# Altium PCB EMS_TC_PCB_V1.PcbDoc
Units mil, origin at the board's own origin, x right, y up, seen from the top; angles counter-clockwise.
Board outline 4800 x 9560 mil, 2 copper layers (Top Layer, Bottom Layer); 57 components, 74 nets, 349 pads, 0 vias.
Unrouted connection lines stored in the file: 159.
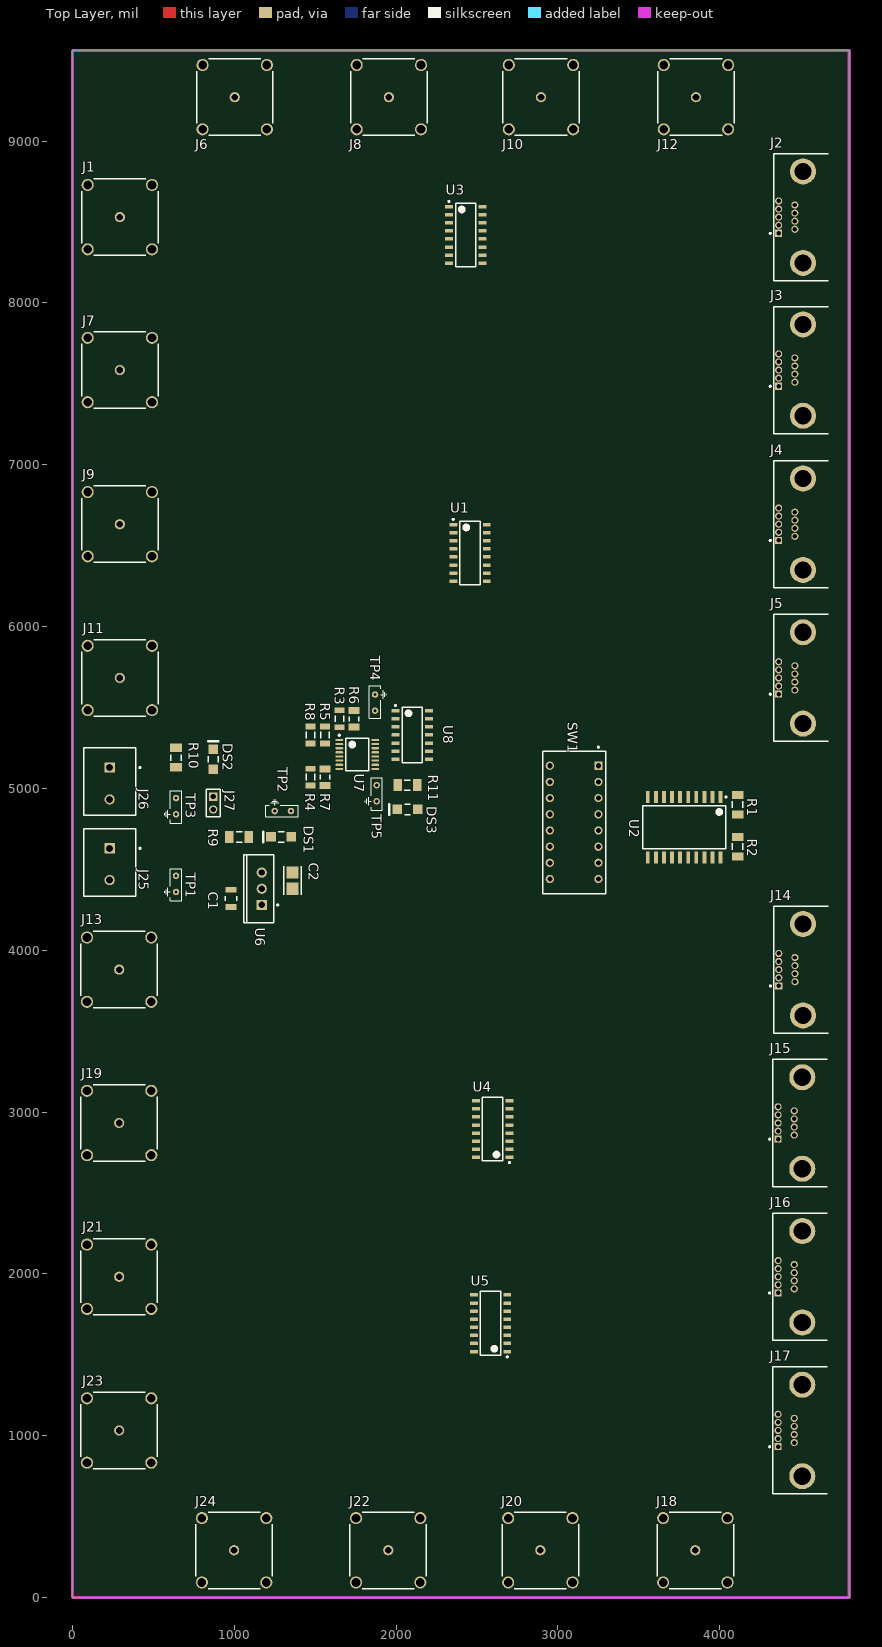
[diagram p0: Top Layer view]
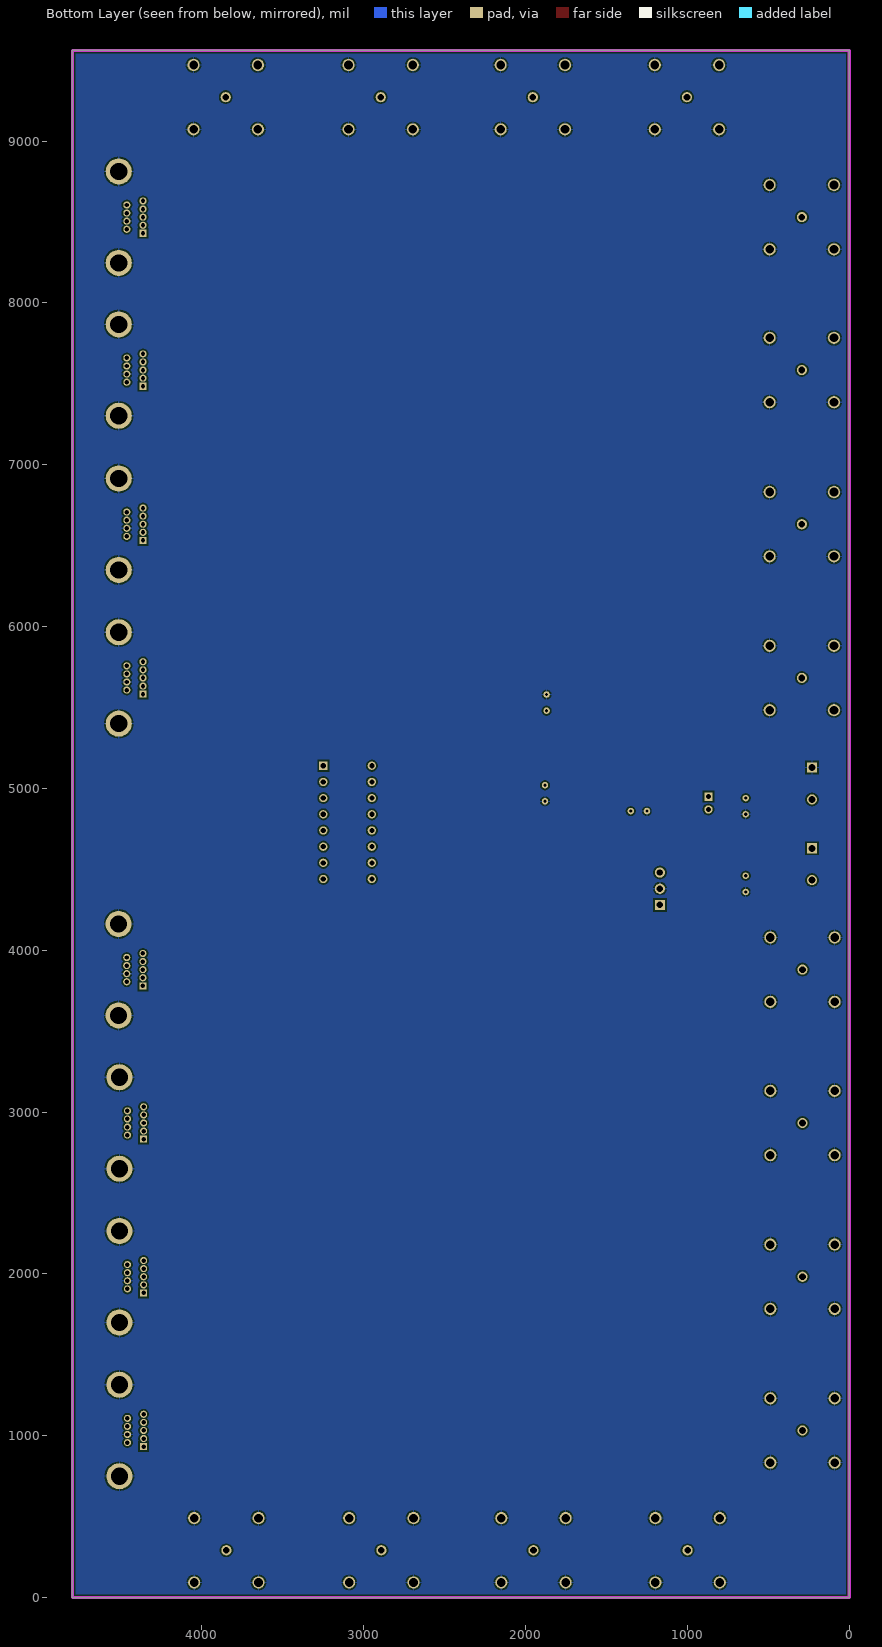
[diagram p1: Bottom Layer view, seen from below]

## Layer stack, top to bottom
Top Solder: solder mask 0.4, Solder Resist, Dk 3.5
Top Layer: signal copper 1.4
Dielectric 1: dielectric 12.6, FR-4, Dk 4.8
Bottom Layer: signal copper 1.4
Bottom Solder: solder mask 0.4, Solder Resist, Dk 3.5

## Board outline
0,0 4800,0 4800,9560 0,9560

## Design rules (kind name [scope] priority, off if disabled: settings)
Clearance [All] p1: gap=10 ignorepadtopadclearanceinfootprint=FALSE except(0: Arc-Hole Track-Hole SMDPad-Hole THPad-Hole Via-Hole Fill-Hole Poly-Hole Region-Hole Text-Hole)
DiffPairsRouting "Schematic Differential Pairs Routing_7" [InNet('TRIG_5_P')] p1: maxlimit=10 minlimit=6 mostfreqgap=6 toplayer_minwidth=6 toplayer_maxwidth=15 toplayer_prefwidth=6 bottomlayer_minwidth=6 bottomlayer_maxwidth=15 bottomlayer_prefwidth=6 maxuncoupledlength=500
DiffPairsRouting "Schematic Differential Pairs Routing_6" [InNet('TRIG_1_B_P')] p2: maxlimit=10 minlimit=6 mostfreqgap=6 toplayer_minwidth=6 toplayer_maxwidth=15 toplayer_prefwidth=6 bottomlayer_minwidth=6 bottomlayer_maxwidth=15 bottomlayer_prefwidth=6 maxuncoupledlength=500
DiffPairsRouting "Schematic Differential Pairs Routing_5" [InNet('TRIG_4_P')] p3: maxlimit=10 minlimit=6 mostfreqgap=6 toplayer_minwidth=6 toplayer_maxwidth=15 toplayer_prefwidth=6 bottomlayer_minwidth=6 bottomlayer_maxwidth=15 bottomlayer_prefwidth=6 maxuncoupledlength=500
DiffPairsRouting "Schematic Differential Pairs Routing_4" [InNet('TELE_3_P')] p4: maxlimit=10 minlimit=6 mostfreqgap=6 toplayer_minwidth=6 toplayer_maxwidth=15 toplayer_prefwidth=6 bottomlayer_minwidth=6 bottomlayer_maxwidth=15 bottomlayer_prefwidth=6 maxuncoupledlength=500
DiffPairsRouting "Schematic Differential Pairs Routing_3" [InNet('TRIG_6_P')] p5: maxlimit=10 minlimit=6 mostfreqgap=6 toplayer_minwidth=6 toplayer_maxwidth=15 toplayer_prefwidth=6 bottomlayer_minwidth=6 bottomlayer_maxwidth=15 bottomlayer_prefwidth=6 maxuncoupledlength=500
DiffPairsRouting "Schematic Differential Pairs Routing_2" [InNet('TRIG_1_A_N')] p6: maxlimit=10 minlimit=6 mostfreqgap=6 toplayer_minwidth=6 toplayer_maxwidth=15 toplayer_prefwidth=6 bottomlayer_minwidth=6 bottomlayer_maxwidth=15 bottomlayer_prefwidth=6 maxuncoupledlength=500
DiffPairsRouting "Schematic Differential Pairs Routing_1" [InNet('TRIG_3_P')] p7: maxlimit=10 minlimit=6 mostfreqgap=6 toplayer_minwidth=6 toplayer_maxwidth=15 toplayer_prefwidth=6 bottomlayer_minwidth=6 bottomlayer_maxwidth=15 bottomlayer_prefwidth=6 maxuncoupledlength=500
DiffPairsRouting "Schematic Differential Pairs Routing" [InNet('TRIG_2_A_P')] p8: maxlimit=10 minlimit=6 mostfreqgap=6 toplayer_minwidth=6 toplayer_maxwidth=15 toplayer_prefwidth=6 bottomlayer_minwidth=6 bottomlayer_maxwidth=15 bottomlayer_prefwidth=6 maxuncoupledlength=500
DiffPairsRouting [All] p9: maxlimit=10 minlimit=10 mostfreqgap=10 toplayer_minwidth=15 toplayer_maxwidth=15 toplayer_prefwidth=15 bottomlayer_minwidth=15 bottomlayer_maxwidth=15 bottomlayer_prefwidth=15 maxuncoupledlength=500
PolygonConnect [All] p1: connectstyle=Relief reliefconductorwidth=10 reliefentries=4 polygonreliefangle="90 Angle" airgapwidth=10
RoutingVias [All] p1: holewidth=28 width=50 viastyle="Through Hole" minholewidth=28 minwidth=50 maxholewidth=28 maxwidth=50
SolderMaskExpansion [All] p1: expansion=4 istentingtop=FALSE
Width [All] p1: maxlimit=10 minlimit=10 preferedwidth=10
29 further rules are at their usual default settings.

## Classes and differential pairs
differential pair class TRIG_6: TRIG_6
differential pair class TRIG_5: TRIG_5
differential pair class TRIG_4: TRIG_4
differential pair class TRIG_3: TRIG_3
differential pair class TRIG_2_B: TRIG_2_B
differential pair class TRIG_2_A: TRIG_2_A
differential pair class TRIG_1_B: TRIG_1_B
differential pair class TRIG_1_A: TRIG_1_A
differential pair class TELE_6: TELE_6
differential pair class TELE_5: TELE_5
differential pair class TELE_4: TELE_4
differential pair class TELE_3: TELE_3
differential pair class TELE_2_B: TELE_2_B
differential pair class TELE_2_A: TELE_2_A
differential pair class TELE_1_B: TELE_1_B
differential pair class TELE_1_A: TELE_1_A
component class EMS_TC_PWR: C1 C2 DS1 DS2 DS3 J25 J26 J27 R3 R4 R5 R6 R7 R8 R9 R10 R11 TP1 TP2 TP3 TP4 TP5 U6 U7 U8
component class EMS_TC_IO: J1 J2 J3 J4 J5 J6 J7 J8 J9 J10 J11 J12 J13 J14 J15 J16 J17 J18 J19 J20 J21 J22 J23 J24 R1 R2 SW1 U1 U2 U3 U4 U5
differential pair TRIG_6: +TRIG_6_P -TRIG_6_N
differential pair TRIG_5: +TRIG_5_P -TRIG_5_N
differential pair TRIG_4: +TRIG_4_P -TRIG_4_N
differential pair TRIG_3: +TRIG_3_P -TRIG_3_N
differential pair TRIG_2_B: +TRIG_2_B_P -TRIG_2_B_N
differential pair TRIG_2_A: +TRIG_2_A_P -TRIG_2_A_N
differential pair TRIG_1_B: +TRIG_1_B_P -TRIG_1_B_N
differential pair TRIG_1_A: +TRIG_1_A_P -TRIG_1_A_N
differential pair TELE_6: +TELE_6_P -TELE_6_N
differential pair TELE_5: +TELE_5_P -TELE_5_N
differential pair TELE_4: +TELE_4_P -TELE_4_N
differential pair TELE_3: +TELE_3_P -TELE_3_N
differential pair TELE_2_B: +TELE_2_B_P -TELE_2_B_N
differential pair TELE_2_A: +TELE_2_A_P -TELE_2_A_N
differential pair TELE_1_B: +TELE_1_B_P -TELE_1_B_N
differential pair TELE_1_A: +TELE_1_A_P -TELE_1_A_N

## Components (designator, comment, footprint, x,y, rotation, side; value= is the part's Value field where it differs from the comment)
C1 "22uF" FP-CL31H-0_2-MFG 980,4320 r90 top
C2 "33uF" FP-C3216-160-0_2-IPC_A 1360,4430 r270 top
DS1 "SML-LX1206GC-TR" LUMX-SML-LX1206GC-TR_V 1290,4700 r180 top
DS2 "SML-LX1206GC-TR" LUMX-SML-LX1206GC-TR_V 870,5180 r90 top
DS3 "SML-LX1206GC-TR" LUMX-SML-LX1206GC-TR_V 2070,4870 r180 top
J1 "TRIG_1A_IN" ROS-51K204-400A5_V 292.82,8530 r90 top
J2 "DRIVER_1A" FP-381-009-112L565-MFG 4669.51,8530 r90 top
J3 "DRIVER_1B" FP-381-009-112L565-MFG 4669.51,7585 r90 top
J4 "DRIVER_2A" FP-381-009-112L565-MFG 4669.51,6632.48 r90 top
J5 "DRIVER_2B" FP-381-009-112L565-MFG 4669.51,5682.52 r90 top
J6 "TELE_1A_OUT" ROS-51K204-400A5_V 1002.81,9271.18 r0 top
J7 "TRIG_1B_IN" ROS-51K204-400A5_V 292.82,7585 r90 top
J8 "TELE_1B_OUT" ROS-51K204-400A5_V 1955.17,9271.18 r0 top
J9 "TRIG_2A_IN" ROS-51K204-400A5_V 292.82,6632.48 r90 top
J10 "TELE_2A_OUT" ROS-51K204-400A5_V 2895.17,9271.18 r0 top
J11 "TRIG_2B_IN" ROS-51K204-400A5_V 292.82,5682.51 r90 top
J12 "TELE_2B_OUT" ROS-51K204-400A5_V 3852.81,9271.18 r0 top
J13 "TRIG_3_IN" ROS-51K204-400A5_V 288.82,3880 r90 top
J14 "DRIVER_3" FP-381-009-112L565-MFG 4670,3880 r90 top
J15 "DRIVER_4" FP-381-009-112L565-MFG 4665.51,2932.48 r90 top
J16 "DRIVER_5" FP-381-009-112L565-MFG 4665.51,1982.48 r90 top
J17 "DRIVER_6" FP-381-009-112L565-MFG 4665.51,1032.48 r90 top
J18 "TELE_3_OUT" ROS-51K204-400A5_V 3848.82,292.17 r180 top
J19 "TRIG_4_IN" ROS-51K204-400A5_V 288.82,2932.48 r90 top
J20 "TELE_4_OUT" ROS-51K204-400A5_V 2891.18,292.17 r180 top
J21 "TRIG_5_IN" ROS-51K204-400A5_V 288.82,1982.48 r90 top
J22 "TELE_5_OUT" ROS-51K204-400A5_V 1951.18,292.17 r180 top
J23 "TRIG_6_IN" ROS-51K204-400A5_V 288.82,1032.48 r90 top
J24 "TELE_6_OUT" ROS-51K204-400A5_V 998.82,292.17 r180 top
J25 "282836-2" TECO-282836-2_V 230,4531.57 r270 top
J26 "282836-2" TECO-282836-2_V 230,5030 r270 top
J27 "M22-2510205" FP-M22-2510205-MFG 870,4909.37 r270 top
R1 "10k" RESC3116X65X40ML10T20 4110,4900 r270 top
R2 "10k" RESC3116X65X40ML10T20 4110,4639.96 r90 top
R3 "8.2k" RESC3216X70X50LL05T20 1650,5430 r90 top
R4 "8.2k" RESC3216X70X50LL05T20 1470,5070 r270 top
R5 "8.2k" RESC3216X70X50LL05T20 1560,5330 r90 top
R6 "820k" RESC3216X70X50LL20T25 1740,5430 r270 top
R7 "820k" RESC3216X70X50LL20T25 1560,5070 r90 top
R8 "1.8k" RESC3216X70X50LL05T20 1470,5330 r270 top
R9 "330" FP-CRCW1206-e3-IPC_A 1030,4700 r0 top
R10 "330" FP-CRCW1206-e3-IPC_A 640,5190 r90 top
R11 "330" FP-CRCW1206-e3-IPC_A 2070,5020 r0 top
SW1 "TRIG_1A_IN" FP-78B08ST-MFG 3100,4790 r270 top
TP1 "+28V_IN Probe" TDR_Probe 640,4460 r270 top
TP2 "+5V_LDO Probe" TDR_Probe 1350,4860 r180 top
TP3 "+5V_IN Probe" TDR_Probe 640,4940 r270 top
TP4 "D_!EN" TDR_Probe 1870,5480 r90 top
TP5 "D_EN" TDR_Probe 1880,5020 r270 top
U1 "DS26C31TM" D0016A_L 2456.65,6455 r0 top
U2 "SN74ABT240ADW" DW0020A_N 3780,4760 r270 top
U3 "DS26C32ATM" D0016A_L 2430,8420 r0 top
U4 "DS26C31TM" D0016A_L 2596.65,2895 r180 top
U5 "DS26C32ATM" D0016A_L 2583.35,1695 r180 top
U6 "LM340T-5.0/NOPB" NDE0003A 1170,4380 r90 top
U7 "AD8564" ADI-RU-16_L 1760,5210 r0 top
U8 "SN74AHCT132D" D0014A_L 2100,5330 r0 top

## Footprints (in the part's own frame and the unit in brackets; to place one, negate y for a bottom-side part, rotate by r counter-clockwise, add the part's x,y. Pads: shape width x height; smd on the part's side, far side on the other; paste and mask are expansions set on the pad)
ADI-RU-16_L [mm] "SOP, 16-Leads, Body 5x4.4mm, Pitch 0.65mm, IPC High Density"
  oval 1.25x0.35 smd: 1(-2.825,2.275) 2(-2.825,1.625) 3(-2.825,0.975) 4(-2.825,0.325) 5(-2.825,-0.325) 6(-2.825,-0.975) 7(-2.825,-1.625) 8(-2.825,-2.275) 9(2.825,-2.275) 10(2.825,-1.625) 11(2.825,-0.975) 12(2.825,-0.325) 13(2.825,0.325) 14(2.825,0.975) 15(2.825,1.625) 16(2.825,2.275)
  silkscreen extent -2.95,-2.55 1.8,3.12, body extent -2.25,-2.55 2.25,2.55, height 1.2
D0014A_L [mm] "SOIC, 14-Leads, Body 8.75x4mm, Pitch 1.27mm, IPC High Density"
  rrect18% 1.25x0.55 smd: 1(-2.625,3.81) 2(-2.625,2.54) 3(-2.625,1.27) 4(-2.625,0) 5(-2.625,-1.27) 6(-2.625,-2.54) 7(-2.625,-3.81) 8(2.625,-3.81) 9(2.625,-2.54) 10(2.625,-1.27) 11(2.625,0) 12(2.625,1.27) 13(2.625,2.54) 14(2.625,3.81)
  silkscreen extent -2.75,-4.38 1.6,4.76, body extent -3.02,-4.32 3.02,4.32, height 1.59
D0016A_L [mm] "SOIC, 16-Leads, Body 10x4mm, Pitch 1.27mm, IPC High Density"
  rrect18% 1.25x0.55 smd: 1(-2.625,4.445) 2(-2.625,3.175) 3(-2.625,1.905) 4(-2.625,0.635) 5(-2.625,-0.635) 6(-2.625,-1.905) 7(-2.625,-3.175) 8(-2.625,-4.445) 9(2.625,-4.445) 10(2.625,-3.175) 11(2.625,-1.905) 12(2.625,-0.635) 13(2.625,0.635) 14(2.625,1.905) 15(2.625,3.175) 16(2.625,4.445)
  silkscreen extent -2.75,-5 1.6,5.39, body extent -3,-4.95 3,4.95, height 1.59
DW0020A_N [mm] "SOIC, 20-Leads, Body 13x7.6mm, Pitch 1.27mm, IPC Medium Density"
  rrect17% 1.9x0.6 smd: 1(-4.75,5.715) 2(-4.75,4.445) 3(-4.75,3.175) 4(-4.75,1.905) 5(-4.75,0.635) 6(-4.75,-0.635) 7(-4.75,-1.905) 8(-4.75,-3.175) 9(-4.75,-4.445) 10(-4.75,-5.715) 11(4.75,-5.715) 12(4.75,-4.445) 13(4.75,-3.175) 14(4.75,-1.905) 15(4.75,-0.635) 16(4.75,0.635) 17(4.75,1.905) 18(4.75,3.175) 19(4.75,4.445) 20(4.75,5.715)
  silkscreen extent -4.87,-6.5 3.4,6.69, body extent -5.16,-6.4 5.16,6.4, height 2.52
FP-78B08ST-MFG [mm]
  rect 1.3x1.3 hole 0.8 paste-1000 mask+0: 1(-8.89,3.81)
  round 1.3 hole 0.8 paste-1000 mask+0: 2(-6.35,3.81) 3(-3.81,3.81) 4(-1.27,3.81) 5(1.27,3.81) 6(3.81,3.81) 7(6.35,3.81) 8(8.89,3.81) 9(8.89,-3.81) 10(6.35,-3.81) 11(3.81,-3.81) 12(1.27,-3.81) 13(-1.27,-3.81) 14(-3.81,-3.81) 15(-6.35,-3.81) 16(-8.89,-3.81)
  silkscreen extent -11.92,-4.95 11.2,4.95, body extent -11.3,-5.05 11.3,5.05, height 0.25
FP-381-009-112L565-MFG [mm]
  rect 1.12x1.12 hole 0.7 paste-1000 mask+0: 1(-2.54,7.76)
  round 1.12 hole 0.7 paste-1000 mask+0: 2(-1.27,7.76) 3(0,7.76) 4(1.27,7.76) 5(2.54,7.76) 6(-1.905,5.22) 7(-0.635,5.22) 8(0.635,5.22) 9(1.905,5.22)
  round 4.09 hole 2.69 paste-1000 mask+0: 10(-7.175,3.95) 11(7.175,3.95)
  silkscreen extent -9.97,0 9.97,9.2, body extent -10.07,-8.65 10.07,8.65, height 0.25
FP-C3216-160-0_2-IPC_A [mil]
  rect 76.93x75.05 smd paste+0 mask+0: 1(-50.24,0) 2(50.24,0)
  silkscreen extent -89,-53 89,53, body extent -108,-57 108,57, height 10
FP-CL31H-0_2-MFG [mm]
  rect 0.925x1.7 smd paste+0 mask+0: 1(-1.362,0) 2(1.362,0)
  silkscreen extent -0.33,-0.9 0.33,0.9, body extent -1.92,-1 1.92,1, height 0.25
FP-CRCW1206-e3-IPC_A [mil]
  rect 53.39x73.16 smd paste+0 mask+0: 1(-60.08,0) 2(60.08,0)
  silkscreen extent -19,-31 19,31, body extent -106,-56 106,56, height 10
FP-M22-2510205-MFG [mm]
  rect 1.3x1.3 hole 0.8 paste-1000 mask+0: 1(-1,0)
  round 1.3 hole 0.8 paste-1000 mask+0: 2(1,0)
  silkscreen extent -2.17,-1.1 2.17,1.1, body extent -2.27,-1.2 2.27,1.2, height 0.25
LUMX-SML-LX1206GC-TR_V [mm] "SMD, 2-Leads, Body 3.2x1.6mm"
  rect 1.5x1.5 smd: 1(-1.6,0) 2(1.6,0)
  silkscreen extent -0.45,-0.8 2.85,0.8, body extent -1.6,-0.8 1.6,0.8, height 1.1
NDE0003A [mm] "FM, 3-Leads, Body 10.7x4.7mm, Pitch 2.54mm"
  rect 1.6x1.6 hole 1: 1(-2.54,0)
  round 1.6 hole 1: 2(0,0) 3(2.54,0)
  silkscreen extent -5.35,-2.63 5.35,2.85, body extent -5.4,-1.9 5.4,2.9, height 19.4
RESC3116X65X40ML10T20 [mm] "Chip Resistor, 2-Leads, Body 3.10x1.60mm, IPC Low Density"
  rect 1.25x1.8 smd: 1(-1.525,0) 2(1.525,0)
  silkscreen extent -0.5,-0.8 0.5,0.8, body extent -1.6,-0.85 1.6,0.85, height 0.65
RESC3216X70X50LL05T20 [mm] "Chip Resistor, 2-Leads, Body 3.20x1.60mm, IPC High Density"
  rect 0.9x1.55 smd: 1(-1.325,0) 2(1.325,0)
  silkscreen extent -0.5,-0.67 0.5,0.67, body extent -1.63,-0.82 1.62,0.82, height 0.7
RESC3216X70X50LL20T25 [mm] "Chip Resistor, 2-Leads, Body 3.20x1.60mm, IPC High Density"
  rect 1.1x1.7 smd: 1(-1.3,0) 2(1.3,0)
  silkscreen extent -0.35,-0.75 0.35,0.75, body extent -1.7,-0.9 1.7,0.9, height 0.7
ROS-51K204-400A5_V [mm] "BNC 50R Right Angle Jack, 12.5x32.6x14.5mm, Rosenberger Recommended"
  round 1.6 hole 1.05: 1(0,0)
  round 1.9 hole 1.35: MH(-5.05,-5.05) MH(-5.05,5.05) MH(5.05,-5.05) MH(5.05,5.05)
  silkscreen extent -6,-6 6,6, body extent -6.25,-6 6.25,26.6, height 15.25
TDR_Probe [mil]
  round 40 hole 20: 1(0,0) 2(100,0)
  silkscreen extent -45,-70 155,35
TECO-282836-2_V [mm] "Female Header, Pitch 5mm, 1 x 2 Position, Height 10mm"
  rect 1.6x1.6 hole 1.1: 1(-2.5,0)
  round 1.6 hole 1.1: 2(2.5,0)
  silkscreen extent -5.6,-4.1 5,4.88, body extent -5.6,-4.1 5,4.1, height 10

## Part data
C1: library part CMP-13271-000012-1, "CAP CER 22UF 25V X5R 1206", Manufacturer=Samsung, Manufacturer Part Number=CL31A226KAHNNNE, Package=CL31H-0.2, Temperature="-55°C to +85°C", Temperature Characteristic=X5R, Temperature Coefficient=15%, Temperature Range High=+85°C, Temperature Range Low=-55°C, Tolerance=10%, Voltage Rating=25V, Automotive=No, Capacitance=22uF, Category=Cap, ComponentLink2Description=Datasheet, ComponentLink2URL=http://www.samsungsem.com/kr/support/product-search/mlcc/__icsFiles/afieldfile/2019/05/10/19-CL31A226KAHNNNE.pdf, Device Class L1="Passive Components", Device Class L2=Capacitors, Device Class L3="Ceramic Capacitors", Digikey Description="CAP CER 22UF 25V X5R 1206", Height=1.8mm, Ipc Land Pattern Name=CAPC320160X160, Lead Free=Yes, Material=Ceramic, Octopart=https://octopart.com/cl31a226kahnnne-samsung-19832795, RoHS=TRUE
C2: library part CMP-08246-002728-1, "Multilayer Ceramic Capacitors 33uF ±20% 25V X5R SMD 1206", Case Code (Imperial)=1206, Case Code (Metric)=3216, Dielectric=X5R, Dielectric Material=Ceramic, Max Operating Temperature=85°C, Min Operating Temperature=-55°C, Package Quantity=1, Tolerance=20%, Voltage Rating=25V, Capacitance=33uF, Case/Package=1206, Depth=1.6mm, Lead Free="Lead Free", Length=3.2mm, Mount="Surface Mount", Packaging="Tape and Reel", REACH SVHC="No SVHC", Resistor Type=Ceramic, RoHS Compliant=Yes, Series=C, Termination=SMD/SMT, Thickness=1.6mm, Voltage Rating (DC)=25V, Weight=0.000571oz, Width=0.063inch
DS1 DS2 DS3: library part CMP-2000-07122-1, "Green Led, Water Clear Lens, 10 mcd, 565 nm, 2.2 V, -40 to 85 degC, 2-Pin SMD, RoHS, Tape and Reel", Color=Green, Manufacturer=Lumex, Operating Temperature=-40to85C, Package Description="2-Pin Surface Mount Device, Body 3.2 x 1.6 mm", Reverse Voltage=5(Min)V, Supplier_Package=SMD, COO=CN, Datasheet URL=http://www.mouser.com/ds/2/244/SML-LX1206GC-TR-112732.pdf, Datasheet Version="Rev. J, 04/2011", Dimension=3.2x1.6x1.1mm, Dominant Wavelength=N/A, ECCN=EAR99, Family=SML-LX1206GC, HTS=8541402000, Intensity=10mcd, LED Material=GaP, Lens Appearance=ColorlessNonDiffused, Lens Dimensions=2x1.6x0.5mm, Manufacturer URL=http://www.lumexinstruments.com/, Mounting=SurfaceMount, Mounting Technology=SurfaceMount, Number of LEDs=1, Package Reference=SML-LX1206GC-TR, Packaging=TapeandReel, Part No=SML-LX1206GC-TR, Peak Wavelength=565nm, Pin_Count=2, RoHS=Yes, Supplier=Lumex, Supplier Standard Pack=3,000, Type=Uni-Color, Viewing Angle=160
J1 J6 J7 J8 J9 J10 J11 J12 J13 J18 J19 J20 J21 J22 J23 J24: library part CMP-0753-00004-1, "BNC 50R Right Angle Jack, Panel Feedthrough, Up to 10 GHz, -55 to 155 degC", Manufacturer=Rosenberger, PartNumber=51K204-400A5, ComponentLink1Description="Manufacturer URL", ComponentLink1URL=http://www.rosenberger.de, ComponentLink2Description=Datasheet, ComponentLink2URL=http://rosenberger.de/ok/images/documents/db/51K204-400A5.pdf, ComponentLink3Description="Package Specification", ComponentLink3URL=http://rosenberger.de/ok/images/documents/db/51K204-400A5.pdf, ComponentLink4Description="Series Overview / Design Note", ComponentLink4URL=http://rosenberger.de/ok/images/documents/spez/51.pdf, ComponentLink5Description="Webshop / RFQ", ComponentLink5URL=http://www.rosenberger.com/en/contact/sales/, DatasheetVersion=d00, Design Note="Footprint in library is a generic example - only application specific footprint delivers High Performance", Mounting Technology="Through Hole", PackageDescription="50R BNC Right Angle Jack, 12.5 x 32.6 x 14.5 mm", PackageReference=51K204-400A5, PackageVersion=d00
J2 J3 J4 J5 J14 J15 J16 J17: library part CMP-42562-000005-1, "CONN MICRO-D PLUG 9POS R/A SLDR", Current Rating=1A, Manufacturer="NorComp Inc.", Manufacturer Part Number=381-009-112L565, Temperature="-55°C to +85°C", Temperature Range High=+85°C, Temperature Range Low=-55°C, Voltage Rating=500V, Automotive=No, Category=Conn, ComponentLink2Description=Datasheet, ComponentLink2URL=https://www.norcomp.net/rohspdfs/Micro-D/381-009-112L565.pdf, Conn Gender=Male, Conn Orientation="Right Angle", Contact Material=Gold,Nickel, Device Class L1=Connectors, Device Class L2="D-Sub Connectors", Device Class L3=unset, Digikey Description="CONN MICRO-D PLUG 9POS R/A SLDR", Height=8.003mm, Lead Free=Yes, Mouser Description="D-Sub Micro-D Connectors MICRO-D 9P R/A W/ STNDOFF/BRDLK", Number Of Contacts=9, Octopart=https://octopart.com/381-009-112l565-norcomp-21388372, Package=381-009-112L565, Pitch=1.27mm, RoHS=TRUE, Shielding=true
J25 J26: library part CMP-1684-00017-1, "Female Header, Pitch 5 mm, 1 x 2 Position, Height 10 mm, Tail Length 3.5 mm, Rohs, Bulk", Color=Green, Current=13.5A, Manufacturer="TE Connectivity", Package Description="Female Header, Pitch 5 mm, 1 x 2 Position, Height 10 mm, Tail Length 3.5 mm", Package Reference=THD, Standard Package=300, Voltage=300V, 3D Model=282836-2.pdf, Category=Connectors,Interconnects, Clamp Material - Plating=Brass-NickelPlated, Contact Material - Plating=Brass-TinPlated, Datasheet URL=http://www.te.com.cn/commerce/DocumentDelivery/DDEController?Action=showdoc&DocId=Catalog+Section%7F1308389_EUROSTYLE_TERMINAL_BLOCKS%7F0607%7Fpdf%7FEnglish%7FENG_CS_1308389_EUROSTYLE_TERMINAL_BLOCKS_0607.pdf%7F282836-2, Dynamic Catalog=BuchananSeries, Family=TerminalBlocks-WiretoBoard, Featured Product=EurostyleTerminalBlockConnectors, Features=Interlocking(Side), Housing Material=Polyamide(PA66),Nylon6/6, Manufacturer URL=http://www.te.com, Mating Orientation=HorizontalwithBoard, Mounting Type=ThroughHole, Number of Levels=1, Other Names="5ULV-02B / A98076", Packaging=Bulk, Pitch="0.197\"(5.00mm)", Positions Per Level=2, Product Training Modules=Wire-to-BoardEurostyleTerminalBlocks, RoHS Information=282836-2StatementofCompliance, Screw Material - Plating=Brass-NickelPlated, Screw Thread=M3, Series=Buchanan, Torque - Screw=0.68Nm(6Lb-In), Wire Gauge=16-30AWG, Wire Termination=Screw-RisingCageClamp
J27: library part CMP-15831-000005-1, "CONN HEADER VERT 2POS 2MM", Current Rating=2A, Manufacturer=Harwin, Package=0, Temperature="-40°C to +105°C", Temperature Range High=+105°C, Temperature Range Low=-40°C, Automotive=No, Category=Conn, ComponentLink2Description=Datasheet, ComponentLink2URL=https://cdn.harwin.com/pdfs/C018XX_M22_Series_Connectors.pdf, Conn Gender=Male, Conn Orientation=Vertical, Contact Material=Gold,Nickel, Device Class L1=Connectors, Device Class L2="Headers and Wire Housings", Device Class L3=unset, Digikey Description="CONN HEADER VERT 2POS 2MM", Footprint Url=https://cdn.harwin.com/pdfs/M22-251.pdf, Height=5.45mm, Lead Free=Yes, Manufacturer Part Number=M22-2510205, Mouser Description="Headers & Wire Housings 2 PIN SIL VERTICAL GOLD PIN HEADER", Number Of Contacts=2, Number Of Rows=1, Octopart=https://octopart.com/m22-2510205-harwin-2538221, Pitch=2mm, RoHS=TRUE
R1 R2: library part CMP-1014-00623-2, "Chip Resistor, 10 KOhm, +/- 1%, 0.25 W, -55 to 155 degC, 1206 (3216 Metric), RoHS, Tape and Reel", Case Code (Imperial)=1206, Case Code (Metric)=3216, Manufacturer=Yageo, Max Operating Temperature=155degC, Min Operating Temperature=-55degC, Package Description="2-Pin Surface Mount Device, Body 3.1 x 1.6 mm", Package Quantity=5000, Package Reference=1206.0, Power Rating=250mW, Resistance=10KOhm, Temperature Coefficient=100ppm/degreesC, Tolerance=1%, Voltage Rating=200V, Case/Package=1206, Composition=ThickFilm, Datasheet URL=http://www.yageo.com/NewPortal/yageodocoutput?fileName=/pdf/R-Chip/PYu-RC_Group_51_RoHS_L_5.pdf, Datasheet Version="Rev. 5, 10/2016", Depth=1.6mm, Height=0.55mm, Lead Free=LeadFree, Length=3.1mm, Manufacturer URL=http://www.yageo.com/, Military Standard=Not, Packaging=TapeandReel, REACH SVHC=Unknown, RoHSCompliant=true, Termination=SMD/SMT, Width=1.6mm
R3 R4 R5: library part CMP-2003-00870-1, Manufacturer=Panasonic, Part Number=ERJ8ENF8201V
R6 R7: library part CMP-2003-00010-1, Manufacturer=Panasonic, Part Number=ERA8AEB824V
R8: library part CMP-2003-00168-1, Manufacturer=Panasonic, Part Number=ERJ8ENF1801V
R9 R10 R11: library part CMP-2003-02098-2, "RES Thick Film, 330Ω, 1%, 0.25W, 100ppm/°C, 1206", Case Code (Imperial)=1206, Case Code (Metric)=3216, Max Operating Temperature=155°C, Max Power Dissipation=250mW, Min Operating Temperature=-55°C, Package Quantity=10, Resistance=330R, Temperature Coefficient=100ppm/°C, Tolerance=1%, Voltage Rating=200V, Case/Package=1206, Composition="Thick Film", Contact Plating=Tin, Depth=1.6mm, Features="Automotive AEC-Q200", Height=0.55mm, Lead Free="Lead Free", Length=3.2mm, Military Standard=Not, Mount="Surface Mount", Number of Terminations=2, Packaging="Tape and Reel", Power Rating=250mW, Radiation Hardening=No, Termination=SMD/SMT, Voltage Rating (DC)=200V, Weight=0.000353oz, Width=1.6mm
SW1: library part CMP-31942-000004-1, "SWITCH SLIDE DIP SPST 150MA 30V", Contact Current Rating=150mA, Contact Resistance=30mΩ, Manufacturer=Grayhill, Manufacturer Part Number=78B08ST, Temperature="-40°C to +85°C", Temperature Range High=+85°C, Temperature Range Low=-40°C, Voltage Rating Dc=30V, Automotive=No, Category=Switch, ComponentLink2Description=Datasheet, ComponentLink2URL=http://www.grayhill.com/assets/1/7/DIP_Series_78_SPST-4PST.pdf#bookmark=id.nagx8c1orts0, Device Class L1=Electromechanical, Device Class L2=Switches, Device Class L3="DIP Switches", Digikey Description="SWITCH SLIDE DIP SPST 150MA 30V", Electromechanical Life=2000Cycles, Height=8.05mm, Lead Free=Yes, Mount="Through Hole", Mouser Description="DIP Switches / SIP Switches DIP Switch SPST 8 Pos Tape Seal", Number Of Circuits=8, Octopart=https://octopart.com/78b08st-grayhill-913939, Package=78B08ST, RoHS=TRUE, Standoff Height=0.46mm, Throw Configuration=SPST
TP1 TP2 TP3 TP4 TP5: library part TP_TDR, "Small Pad Holes for the TDR Probes"
U1 U4: library part CMP-0058-00990-3, "CMOS Quad Tri-State Differential Line Driver, 16-pin Narrow SOIC", Manufacturer="Texas Instruments", PackageTopMarking=NSUZXYTTE#*DS26C31TM, PowerWise=N, Code_IPC=SOIC127P600-16, Code_JEDEC=MS-012-AC, ComponentLink1Description="Datasheet URL", ComponentLink1URL=http://www.ti.com/general/docs/lit/getliterature.tsp?genericPartNumber=DS26C31T&fileType=pdf, CompType="Interface IC", PackageDescription="Molded Package, SO, .150in Wide, 16 Lead", PackageReference=D0016A, PinCount=16, RoHS=N
U2: library part CMP-1615-00030-3, "Octal Buffers/Drivers With 3-State Outputs, DW0020A, TUBE", F @ Nom Voltage(Max)(Mhz)=150, Generic Part Number=SN74ABT240A, ICC @ Nom Voltage(Max)(mA)=0.0055, Manufacturer="Texas Instruments", Operating Temperature Range(C)="-40 to 85", Rating=Catalog, tpd @ Nom Voltage(Max)(ns)=4.8, Voltage(Nom)(V)=5, Bits(#)=8, Code_JEDEC=MS-013, DatasheetVersion=SCBS098I, Input Type=TTL, Output Drive (IOL/IOH)(Max)(mA)=-32/64, Output Type=TTL, PackageReference=DW0020A, Schmitt Trigger=No, Technology Family=ABT, VCC(Max)(V)=5.5, VCC(Min)(V)=4.5
U3 U5: library part CMP-0058-00986-3, "CMOS Quad Differential Line Receiver, 16-pin Narrow SOIC", Manufacturer="Texas Instruments", PackageTopMarking=NSUZXYTTE#*DS26C32ATM, PowerWise=N, Code_IPC=SOIC127P600-16, Code_JEDEC=MS-012-AC, ComponentLink1Description="Datasheet URL", ComponentLink1URL=http://www.ti.com/general/docs/lit/getliterature.tsp?genericPartNumber=DS26C32AT&fileType=pdf, CompType="Interface IC", PackageDescription="Molded Package, SO, .150in Wide, 16 Lead", PackageReference=D0016A, PinCount=16, RoHS=N
U6: library part CMP-0062-02433-3, "Series 3-Terminal Positive Regulators, 3-pin TO-220, Pb-Free", Manufacturer="Texas Instruments", PackageTopMarking="NSUZXYTTE#*LM340T5*7805 P+", PowerWise=N, ComponentLink1Description="Datasheet URL", ComponentLink1URL=http://www.ti.com/general/docs/lit/getliterature.tsp?genericPartNumber=LM340-N&fileType=pdf, CompType="LDO IC", PackageDescription="TO-220, Molded, 3 Lead, Straight", PackageReference=NDE0003A, PinCount=3, RoHS=Y
U7: library part CMP-0783-00155-1, "Quad Single Supply Comparator, 5 V, 7 ns Delay, Industrial, 16-pin SOP (RU-16), Reel", Manufacturer="Analog Devices", PartNumber=AD8564ARUZ-REEL, Total Power (mW)=150mW, Voltage Supply (V)="+/- 5", Code_JEDEC=MO-153AB, ComponentLink1Description="Manufacturer URL", ComponentLink1URL=http://www.analog.com/en/index.html, ComponentLink2Description=Datasheet, ComponentLink2URL=http://www.analog.com/static/imported-files/data_sheets/AD8564.pdf, ComponentLink3Description="Package Specification", ComponentLink3URL=http:/www.analog.com/static/imported-files/packages/36244347913743854010197452789RU16.pdf, ComponentLink4Description="URL Link1", ComponentLink4URL="Product URL:http://www.analog.com/en/special-linear-functions/comparators/ad8564/products/product.html", DatasheetVersion="Rev. B", Input Range (V)="-4.9 to 3.5", Mounting Technology="Surface Mount", PackageDescription="16-Pin Thin Shrink Small Outline Package, Body 5 x 4.4 mm, Pitch 0.65 mm", PackageReference=RU-16, PackageVersion=Nov-02, Packing=Reel
U8: library part CMP-1627-00035-3, "Quadruple Positive-NAND Gates With Schmitt-Trigger Inputs, D0014A, TUBE", F @ Nom Voltage(Max)(Mhz)=70, Generic Part Number=SN74AHCT132, ICC @ Nom Voltage(Max)(mA)=0.02, Manufacturer="Texas Instruments", Operating Temperature Range(C)="-40 to 85", Rating=Catalog, tpd @ Nom Voltage(Max)(ns)=10, Voltage(Nom)(V)=5, Bits(#)=4, Code_JEDEC=MS-012, DatasheetVersion=SCLS366G, Input Type=TTL, Output Drive (IOL/IOH)(Max)(mA)=8/-8, Output Type=CMOS, PackageReference=D0014A, Schmitt Trigger=Yes, Technology Family=AHCT, VCC(Max)(V)=5.5, VCC(Min)(V)=4.5

## Nets (pads, with @x,y where several pads share a name; then routed paths per layer and width w, separated by ;. In a path a pad name is that pad's centre, name@x,y a point inside that pad or via, vN(x,y) a via of type N, cw(c..) or ccw(c..) an arc to the next point about the centre after c; other vN are vias at no path point)
+5V: C2.1 DS1.1 J27.2 R3.2 TP2.1 U1.16 U2.20 U3.4 U3.16 U4.16 U5.4 U5.16 U6.3 U7.7 U7.11 U7.14
+5V_IN: DS2.1 J2.2 J3.2 J4.2 J5.2 J14.2 J15.2 J16.2 J17.2 J26.2 J27.1 R4.2 TP3.1
+28V: C1.1 J2.1 J3.1 J4.1 J5.1 J14.1 J15.1 J16.1 J17.1 J25.2 R5.2 TP1.1 U6.1
"+28V Ret": J2.6 J3.6 J4.6 J5.6 J14.6 J15.6 J16.6 J17.6 J25.1 R8.1
Driver_EN: R11.1 TP5.1 U1.4 U4.4 U8.6
GND: C1.2 C2.2 DS3.2 J1.MH J2.7 J2.10 J2.11 J3.7 J3.10 J3.11 J4.7 J4.10 J4.11 J5.7 J5.10 J5.11 J6.MH J7.MH J8.MH J9.MH J10.MH J11.MH J12.MH J13.MH J14.7 J14.10 J14.11 J15.7 J15.10 J15.11 J16.7 J16.10 J16.11 J17.7 J17.10 J17.11 J18.MH J19.MH J20.MH J21.MH J22.MH J23.MH J24.MH J26.1 R1.2 R2.2 R6.1 R7.1 R9.1 R10.1 TP1.2 TP2.2 TP3.2 TP4.2 TP5.2 U1.8 U2.10 U3.8 U3.12 U4.8 U5.8 U5.12 U6.2 U7.3 U7.6
INV_Driver_EN: TP4.1 U1.12 U4.12 U8.3 U8.4 U8.5
NetDS1_2: DS1.2 R9.2
NetDS2_2: DS2.2 R10.2
NetDS3_1: DS3.1 R11.2
NetJ6_1: J6.1 U3.3
NetJ8_1: J8.1 U3.13
NetJ10_1: J10.1 U3.5
NetJ12_1: J12.1 U3.11
NetJ18_1: J18.1 U5.3
NetJ20_1: J20.1 U5.13
NetJ22_1: J22.1 U5.5
NetJ24_1: J24.1 U5.11
NetR1_1: R1.1 U2.1
NetR2_1: R2.1 U2.19
NetR3_1: R3.1 R6.2 U7.1
NetR4_1: R4.1 R7.2 U7.8
NetR5_1: R5.1 R8.2 U7.2
NetSW1_9: SW1.9 SW1.10 SW1.11 SW1.12 SW1.13 SW1.14 SW1.15 SW1.16
NetU1_1: U1.1 U2.18
NetU1_7: U1.7 U2.16
NetU1_9: U1.9 U2.14
NetU1_15: U1.15 U2.12
NetU2_3: U2.3 U4.15
NetU2_5: U2.5 U4.9
NetU2_7: U2.7 U4.7
NetU2_9: U2.9 U4.1
TELE_1_A_N: J2.5 U3.1
TELE_1_A_P: J2.4 U3.2
TELE_1_B_N: J3.5 U3.15
TELE_1_B_P: J3.4 U3.14
TELE_2_A_N: J4.5 U3.7
TELE_2_A_P: J4.4 U3.6
TELE_2_B_N: J5.5 U3.9
TELE_2_B_P: J5.4 U3.10
TELE_3_N: J14.5 U5.1
TELE_3_P: J14.4 U5.2
TELE_4_N: J15.5 U5.15
TELE_4_P: J15.4 U5.14
TELE_5_N: J16.5 U5.7
TELE_5_P: J16.4 U5.6
TELE_6_N: J17.5 U5.9
TELE_6_P: J17.4 U5.10
TRIG_1_A_IN: J1.1 SW1.1 U2.2
TRIG_1_A_N: J2.8 U1.3
TRIG_1_A_P: J2.3 U1.2
TRIG_1_B_IN: J7.1 SW1.2 U2.4
TRIG_1_B_N: J3.8 U1.5
TRIG_1_B_P: J3.3 U1.6
TRIG_2_A_IN: J9.1 SW1.3 U2.6
TRIG_2_A_N: J4.8 U1.11
TRIG_2_A_P: J4.3 U1.10
TRIG_2_B_IN: J11.1 SW1.4 U2.8
TRIG_2_B_N: J5.8 U1.13
TRIG_2_B_P: J5.3 U1.14
TRIG_3_IN: J13.1 SW1.5 U2.11
TRIG_3_N: J14.8 U4.3
TRIG_3_P: J14.3 U4.2
TRIG_4_IN: J19.1 SW1.6 U2.13
TRIG_4_N: J15.8 U4.5
TRIG_4_P: J15.3 U4.6
TRIG_5_IN: J21.1 SW1.7 U2.15
TRIG_5_N: J16.8 U4.11
TRIG_5_P: J16.3 U4.10
TRIG_6_IN: J23.1 SW1.8 U2.17
TRIG_6_N: J17.8 U4.13
TRIG_6_P: J17.3 U4.14
VOUT_5V: U7.5 U8.2
VOUT_28V: U7.4 U8.1
pads on no net: J2.9 J3.9 J4.9 J5.9 J14.9 J15.9 J16.9 J17.9 U7.9 U7.10 U7.12 U7.13 U7.15 U7.16 U8.7 U8.8 U8.9 U8.10 U8.11 U8.12 U8.13 U8.14

## Polygon pours and split planes (outlines as drawn)
GND on Bottom Layer "GND_L02_P001" (solid, pour order 1): 0,9560 4800,9560 4800,0 10,0 0,10

## Keep-outs
Keep-Out Layer:
  the board outline again, w20